# EAGLE board ahe_v1_1 (EAGLE 9.6.2)
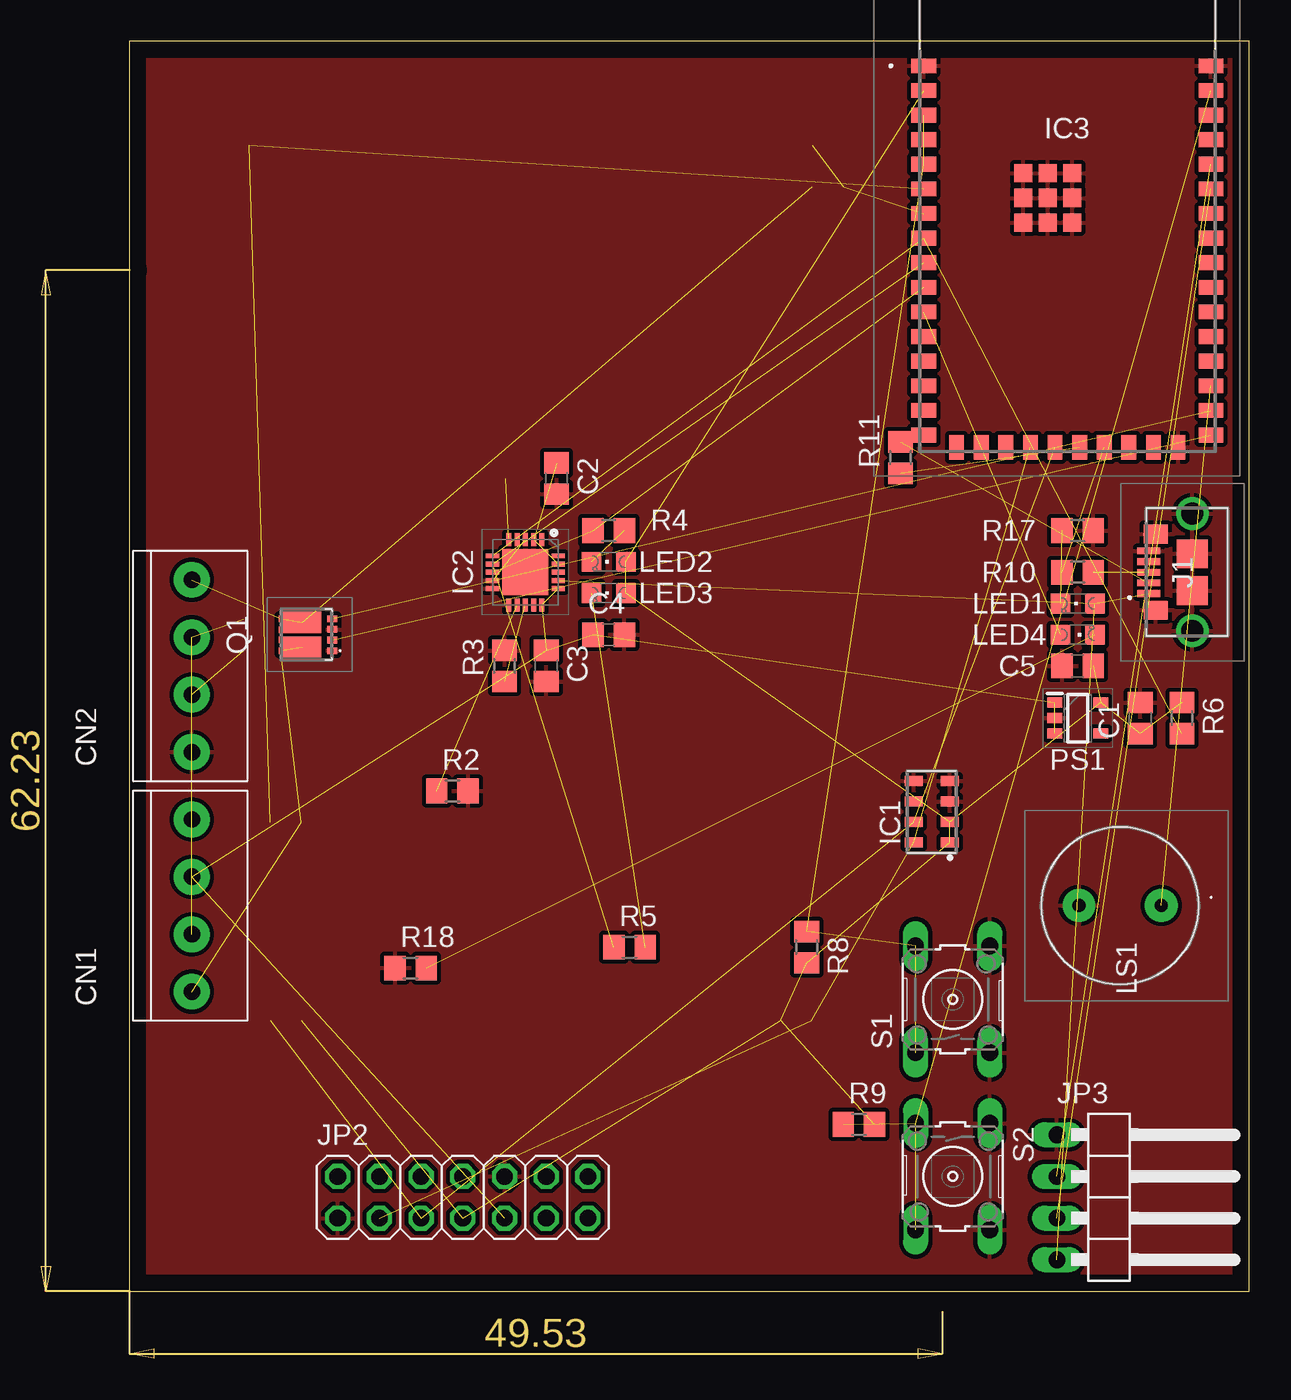
[diagram p0: board, top side]
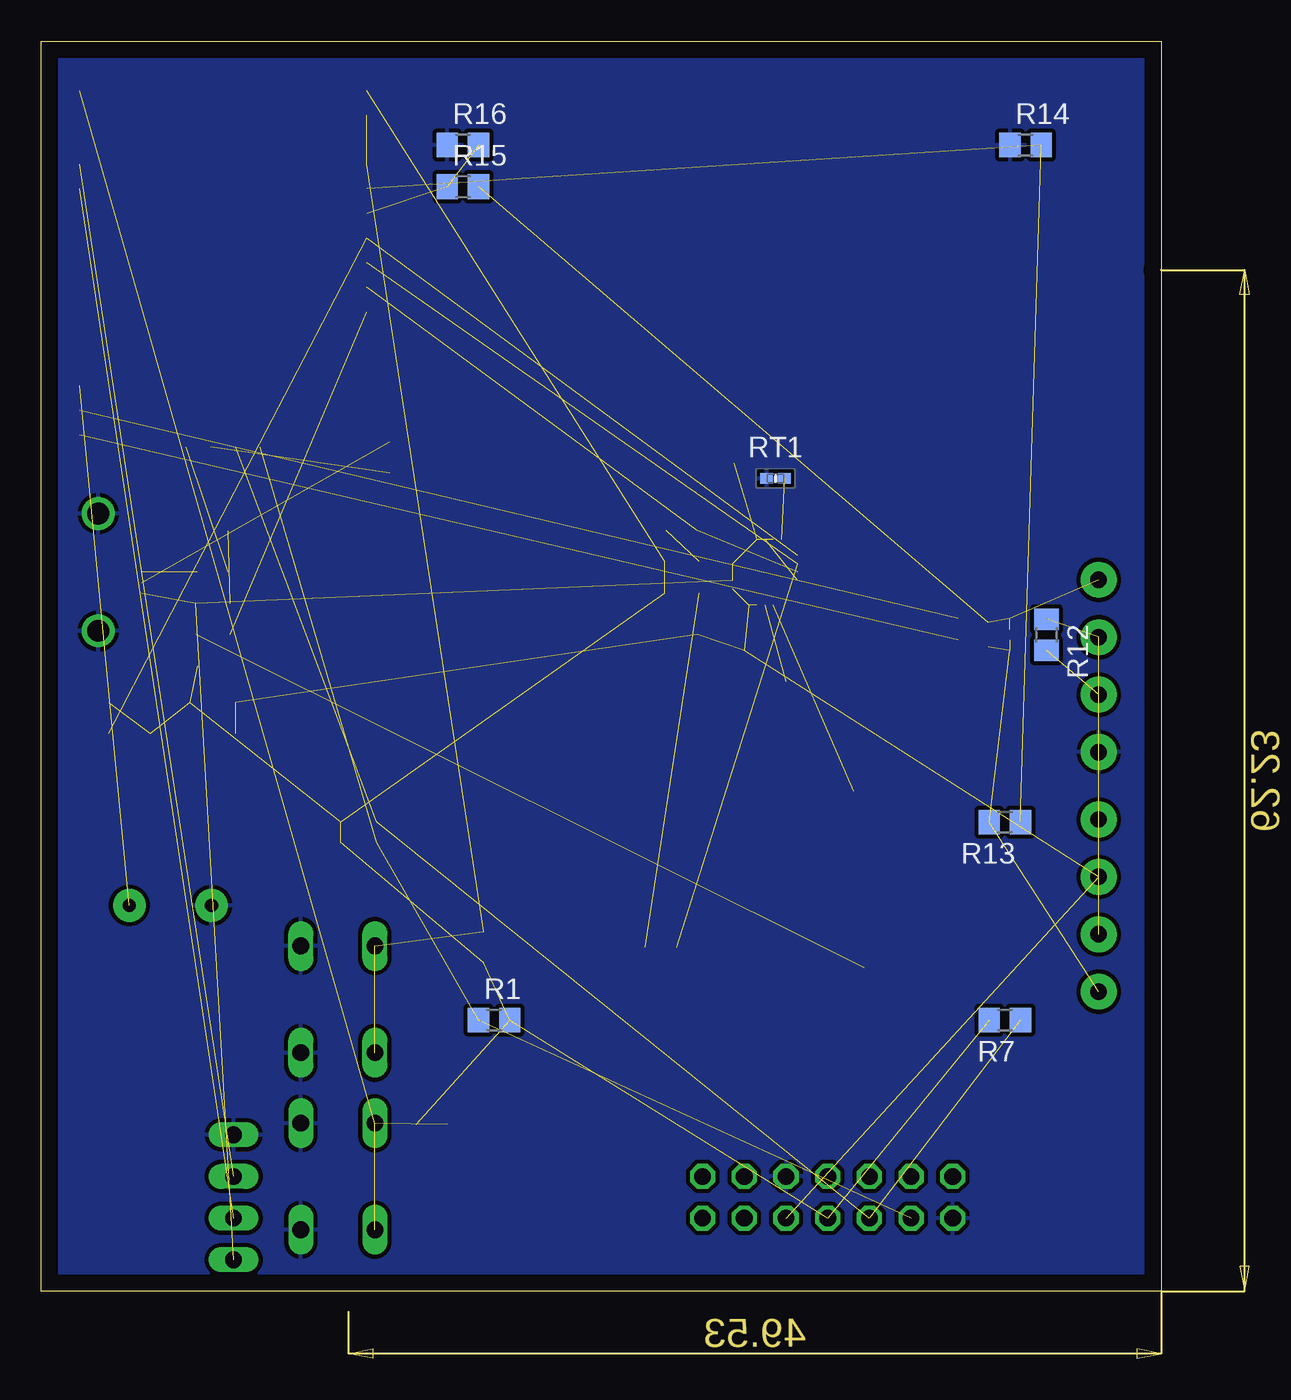
[diagram p1: board, bottom side, seen from below]

Size 68.25 x 76.19 mm. Coordinates in mm from the lower left corner, seen from the top.
Outline: 0,0 68.25,0 68.25,76.19 0,76.19 0,0
Copper layers (1*16): Top 0.035mm / dielectric 1.5mm / Bottom 0.035mm
Design rules "default": minimum track width 6mil, minimum drill 0.35mm, track to track 6mil, track to pad 6mil, pad to pad 6mil, via to via 6mil, smd to smd 6mil, copper to edge 40mil, drill to drill 6mil, minimum pad ring 10mil, minimum via ring 8mil, stop-mask expansion 4mil, vias tented up to drill 0mil, thermal gap 10mil
Net classes: 0 default: width 0.381 mm, clearance 0.254 mm; 1 PWR: width 0.762 mm, clearance 0.305 mm
tKeepout: area 5.7,13.3 to 45.1,71.8

## Footprints (pad centres in the part's own frame; a part is rotated, then mirrored left to right if it is on the bottom)
C0805 = smd 1.3 x 1.5: 1 -0.95,0; 2 0.95,0
1X04-3.5MM = drill 1 pad 2.184: 1 -5.25,0; 2 -1.75,0; 3 1.75,0; 4 5.25,0
MS5607-02BA03 = smd 1.1 x 0.6: 1 -1.1,1.875; 2 -1.1,0.625; 3 -1.1,-0.625; 4 -1.1,-1.875; 5 1.1,-1.875; 6 1.1,-0.625; 7 1.1,0.625; 8 1.1,1.875
QFN50P400X400X100-21N = smd 0.8 x 0.3: 1 -2,1; 2 -2,0.5; 3 -2,0; 4 -2,-0.5; 5 -2,-1; 11 2,-1; 12 2,-0.5; 13 2,0; 14 2,0.5; 15 2,1 | smd 0.3 x 0.8: 6 -1,-2; 7 -0.5,-2; 8 0,-2; 9 0.5,-2; 10 1,-2; 16 1,2; 17 0.5,2; 18 0,2; 19 -0.5,2; 20 -1,2 | smd 2.8 x 2.8: 21 0,0
ESP32S2WROOMIM22S2H3200UH3Q0 = smd 1.5 x 0.9: 1 -8.75,8; 2 -8.75,6.5; 3 -8.75,5; 4 -8.75,3.5; 5 -8.75,2; 6 -8.75,0.5; 7 -8.75,-1; 8 -8.75,-2.5; 9 -8.75,-4; 10 -8.75,-5.5; 11 -8.75,-7; 12 -8.75,-8.5; 13 -8.75,-10; 14 -8.75,-11.5; 15 -8.75,-13; 16 -8.75,-14.5; 27 8.75,-14.5; 28 8.75,-13; 29 8.75,-11.5; 30 8.75,-10; 31 8.75,-8.5; 32 8.75,-7; 33 8.75,-5.5; 34 8.75,-4; 35 8.75,-2.5; 36 8.75,-1; 37 8.75,0.5; 38 8.75,2; 39 8.75,3.5; 40 8.75,5; 41 8.75,6.5; 42 8.75,8 | smd 0.9 x 1.5: 17 -6.75,-15.25; 18 -5.25,-15.25; 19 -3.75,-15.25; 20 -2.25,-15.25; 21 -0.75,-15.25; 22 0.75,-15.25; 23 2.25,-15.25; 24 3.75,-15.25; 25 5.25,-15.25; 26 6.75,-15.25 | smd 1.1 x 1.1: 43 -1.19,-0.05; 44 -1.19,-1.55; 45 0.31,-1.55; 46 0.31,-0.05; 47 0.31,1.45; 48 -1.19,1.45; 49 -2.69,1.45; 50 -2.69,-0.05; 51 -2.69,-1.55
USB307530A = smd 0.4 x 1.4: 1 -1.3,2.65; 2 -0.65,2.65; 3 0,2.65; 4 0.65,2.65; 5 1.3,2.65 | drill 1.329 pad 1.85: MH1 -3.575,0; MH2 3.575,0 | smd 1.75 x 1.9: MP1 -1.125,0; MP2 1.125,0 | smd 1.15 x 1.45: MP3 -2.32,2.23; MP4 2.32,2.23
2X07 = drill 1.016 octagon: 1 -7.62,-1.27; 2 -7.62,1.27; 3 -5.08,-1.27; 4 -5.08,1.27; 5 -2.54,-1.27; 6 -2.54,1.27; 7 0,-1.27; 8 0,1.27; 9 2.54,-1.27; 10 2.54,1.27; 11 5.08,-1.27; 12 5.08,1.27; 13 7.62,-1.27; 14 7.62,1.27
1X04/90 = drill 1.016 long: 1 -3.81,-3.81; 2 -1.27,-3.81; 3 1.27,-3.81; 4 3.81,-3.81
CHIPLED_0805 = smd 1.2 x 1.2: A 0,-1.05; C 0,1.05
CMI96050580T = drill 0.8 pad 2: 1 0,0; 2 0,-5
SOT95P280X125-5N = smd 0.9 x 0.6: 1 -1.4,0.95; 2 -1.4,0; 3 -1.4,-0.95; 4 1.4,-0.95; 5 1.4,0.95
TSM200N03DPQ33RGG = smd 0.4 x 0.6: 1 -0.975,-1.563; 2 -0.325,-1.563; 3 0.325,-1.563; 4 0.975,-1.563 | smd 0.4 x 0.25: 5 0.975,1.563; 6 0.31,1.563; 7 -0.31,1.563; 8 -0.975,1.563 | smd 1.29 x 2.35: 9 0.755,0.262; 10 -0.755,0.262
R0805 = smd 1.3 x 1.5: 1 -0.95,0; 2 0.95,0
THRMC1005X60N = smd 0.75 x 0.65: 1 -0.55,0; 2 0.55,0
B3F-10XX = drill 1.016 long: 1 -3.251,2.261; 2 3.251,2.261; 3 -3.251,-2.261; 4 3.251,-2.261

## Placement (x,y rotation side)
C1  100n  [C0805]  61.59,34.92 90 top
C2  10u  [C0805]  26.04,49.53 270 top
C3  4.7u  [C0805]  25.4,38.1 270 top
C4  1u  [C0805]  29.21,40.01 0 top
C5  1u  [C0805]  57.78,38.1 180 top
CN1  1X4-3.5MM  [1X04-3.5MM]  3.81,23.5 270 top
CN2  1X4-3.5MM  [1X04-3.5MM]  3.81,38.1 270 top
IC1  MS560702BA03-50  [MS5607-02BA03]  48.9,29.21 180 top
IC2  MCP73871-1CCI_ML  [QFN50P400X400X100-21N]  24.13,43.81 270 top
IC3  ESP32-S2-WROOM-I_M22S2H3200UH3  [ESP32S2WROOMIM22S2H3200UH3Q0]  57.15,66.67 0 top
J1  USB3075-30-A  [USB307530A]  64.77,43.81 90 top
JP2  [2X07]  20.32,5.71 0 top
JP3  [1X04/90]  60.33,5.71 270 top
LED1  [CHIPLED_0805]  57.78,41.91 90 top
LED2  [CHIPLED_0805]  29.21,44.45 90 top
LED3  [CHIPLED_0805]  29.21,42.55 90 top
LED4  [CHIPLED_0805]  57.78,40.01 270 top
LS1  CMI-9605-0580T  [CMI96050580T]  62.87,23.5 270 top
PS1  BU33SD5WG-TR  [SOT95P280X125-5N]  57.78,34.92 0 top
Q1  TSM200N03DPQ33_RGG  [TSM200N03DPQ33RGG]  10.79,40.01 90 top
R1  10k  [R0805]  40.64,16.51 0 bottom
R2  40k  [R0805]  19.68,30.48 0 top
R3  2k  [R0805]  22.86,38.1 90 top
R4  330  [R0805]  29.21,46.35 0 top
R5  330  [R0805]  30.48,20.95 0 top
R6  10k  [R0805]  64.14,34.92 90 top
R7  10k  [R0805]  9.53,16.51 180 bottom
R8  10k  [R0805]  41.27,20.95 270 top
R9  10k  [R0805]  44.45,10.16 0 top
R10  33  [R0805]  57.78,43.81 0 top
R11  33  [R0805]  46.99,50.8 90 top
R12  0  [R0805]  6.99,40.01 270 bottom
R13  100k  [R0805]  9.53,28.57 180 bottom
R14  27k  [R0805]  8.26,69.85 0 bottom
R15  100k  [R0805]  42.55,67.31 0 bottom
R16  27k  [R0805]  42.55,69.85 0 bottom
R17  330  [R0805]  57.78,46.35 180 top
R18  330  [R0805]  17.14,19.68 0 top
RT1  103KT1005T-1P  [THRMC1005X60N]  23.5,49.53 0 bottom
S1  [B3F-10XX]  50.16,17.78 90 top
S2  [B3F-10XX]  50.16,6.99 270 top

## Library data of the parts
C1-C5 = rcl; SPICEPREFIX: C
CN1 CN2 LED1-LED4 = adafruit
IC1 = MS560702BA03-50; DESCRIPTION: MS560702BA03-50, Barometric Pressure Sensor, 1200mbar 0 3.6 V Output, 8-Pin QFN; HEIGHT: mm; MANUFACTURER_NAME: TE Connectivity; MANUFACTURER_PART_NUMBER: MS560702BA03-50; MOUSER_PART_NUMBER: 824-MS560702BA03-50; MOUSER_PRICE-STOCK: https://www.mouser.co.uk/ProductDetail/Measurement-Specialties/MS560702BA03-50?qs=urSpXqmdEVImCZG1H%252BT8ng%3D%3D
IC2 = MCP73871-1CCI_ML; DESCRIPTION: Battery Management USB/AC Battery Charger w/Pwr Mgmt; HEIGHT: 1mm; MANUFACTURER_NAME: Microchip; MANUFACTURER_PART_NUMBER: MCP73871-1CCI/ML; MOUSER_PART_NUMBER: 579-MCP73871-1CCI/ML; MOUSER_PRICE-STOCK: https://www.mouser.co.uk/ProductDetail/Microchip-Technology-Atmel/MCP73871-1CCI-ML?qs=wd5RIQLrsJhV5aSUuJa0zQ%3D%3D
IC3 = ESP32-S2-WROOM-I_M22S2H3200UH3; DESCRIPTION: WiFi Modules (802.11) Module ESP32-S2 WROOM IPEX ANT; HEIGHT: 3.45mm; MANUFACTURER_NAME: Espressif Systems; MANUFACTURER_PART_NUMBER: ESP32-S2-WROOM-I(M22S2H3200UH3Q0); MOUSER_PART_NUMBER: 356-ESP32S2WRMI320UH; MOUSER_PRICE-STOCK: https://www.mouser.co.uk/ProductDetail/Espressif-Systems/ESP32-S2-WROOM-IM22S2H3200UH3Q0?qs=vHuUswq2%252BswK%2FNdFP9puyg%3D%3D
J1 = USB3075-30-A; DESCRIPTION: GCT (GLOBAL CONNECTOR TECHNOLOGY) - USB3075-30-A - USB Connector, Micro USB Type B, USB 2.0, Receptacle, 5 Ways, Surface Mount, Right Angle; HEIGHT: 2.7mm; MANUFACTURER_NAME: GCT (GLOBAL CONNECTOR TECHNOLOGY); MANUFACTURER_PART_NUMBER: USB3075-30-A; MOUSER_PART_NUMBER: 640-USB3075-30-A; MOUSER_PRICE-STOCK: https://www.mouser.co.uk/ProductDetail/GCT/USB3075-30-A?qs=KUoIvG%2F9IlbGMJplbp1ybA%3D%3D
JP2 JP3 = pinhead
LS1 = CMI-9605-0580T; DESCRIPTION: Piezo Buzzers & Audio Indicators buzzer, 9.6 mm x 5 mm deep, M, 5 VDC, 80 dB, Through Hole, Audio Indicator; HEIGHT: 5mm; MANUFACTURER_NAME: CUI Inc.; MANUFACTURER_PART_NUMBER: CMI-9605-0580T; MOUSER_PART_NUMBER: 490-CMI-9605-0580T; MOUSER_PRICE-STOCK: https://www.mouser.co.uk/ProductDetail/CUI-Devices/CMI-9605-0580T?qs=P1JMDcb91o49u9Yh70m6sw%3D%3D
PS1 = BU33SD5WG-TR; DESCRIPTION: LDO regulator,3.3V,0.5A,standby,SSOP5 ROHM BU33SD5WG-TR, LDO Voltage Regulator, 0.5A, 3.3 V +/-2%, 1.7 6 Vin, 5-Pin SSOP; HEIGHT: 1.25mm; MANUFACTURER_NAME: ROHM Semiconductor; MANUFACTURER_PART_NUMBER: BU33SD5WG-TR; MOUSER_PART_NUMBER: 755-BU33SD5WG-TR; MOUSER_PRICE-STOCK: https://www.mouser.co.uk/ProductDetail/ROHM-Semiconductor/BU33SD5WG-TR?qs=%2FKR40Cd6GUrQDzRkUEt69Q%3D%3D
Q1 = TSM200N03DPQ33_RGG; DESCRIPTION: MOSFET MOSFET, Dual, N-Ch Trench, 30V, 20A; HEIGHT: 0.8mm; MANUFACTURER_NAME: Taiwan Semiconductor; MANUFACTURER_PART_NUMBER: TSM200N03DPQ33 RGG; MOUSER_PART_NUMBER: 821-TSM200N03DPQ33RG; MOUSER_PRICE-STOCK: https://www.mouser.co.uk/ProductDetail/Taiwan-Semiconductor/TSM200N03DPQ33-RGG?qs=BZBei1rCqCAHGBwVoEKNiA%3D%3D
R1-R18 = rcl; SPICEPREFIX: R
RT1 = 103KT1005T-1P; DESCRIPTION: NTC Thermistors 103kohm 1% 0402; HEIGHT: 0.6mm; MANUFACTURER_NAME: Semitec; MANUFACTURER_PART_NUMBER: 103KT1005T-1P; MOUSER_PART_NUMBER: 954-103KT1005T-1P; MOUSER_PRICE-STOCK: https://www.mouser.co.uk/ProductDetail/Semitec/103KT1005T-1P?qs=wgO0AD0o1vtbPaSgVd2b3g%3D%3D
S1 S2 = switch-omron; MPN: B3F-1000; OC_FARNELL: 176432; OC_NEWARK: 36M3542

## Nets
BAT+ [PWR]: CN1.1 CN2.3 R12.2
BMS_C: IC2.7 IC3.9 R5.1
BMS_G: IC2.6 IC3.8 R6.1
BMS_L: IC2.8 IC3.10 R4.1
EMATCH_1: IC3.27 Q1.2
EMATCH_1- [PWR]: CN1.4 Q1.7 Q1.8 Q1.10 R13.2
EMATCH_2: IC3.28 Q1.4
EMATCH_2- [PWR]: CN2.1 Q1.5 Q1.6 Q1.9 R15.2
EMATCH_N+ [PWR]: CN1.3 CN2.2 R12.1
GND: C1.2 C2.2 C3.2 C4.2 C5.2 CN2.4 IC1.3 IC1.4 IC1.5 IC2.3 IC2.9 IC2.10 IC2.11 IC3.1 IC3.26 IC3.42 IC3.43 IC3.44 IC3.45 IC3.46 IC3.47 IC3.48 IC3.49 IC3.50 IC3.51 J1.5 J1.MH1 J1.MH2 J1.MP1 J1.MP2 J1.MP3 J1.MP4 JP2.1 JP2.10 JP3.1 LS1.2 PS1.2 Q1.1 Q1.3 R2.2 R3.2 R14.1 R16.1 R17.1 R18.1 RT1.1 S1.3 S1.4 S2.1 S2.2
I2C_SCL: IC1.8 IC3.20 JP2.3 R1.1
I2C_SDA: IC1.7 IC3.21 JP2.5 R7.1
IO_1: JP2.11
IO_2: JP2.13
IO_3: JP2.12
IO_4: JP2.14
N$1: IC2.13 R3.1
N$2: IC2.12 R2.1
N$3: IC2.5 RT1.2
N$5: IC2.1
N$9: IC3.41 R9.1 S2.3 S2.4
N$10: IC3.3 IC3.5 R8.1 S1.1 S1.2
N$14: IC3.22 R11.1
N$15: IC3.23 R10.1
N$18: LED1.C R17.2
N$20: LED2.C R4.2
N$21: LED3.C R5.2
N$22: LED4.C R18.2
N$23: IC3.11 LED4.A
SENSE_1: IC3.6 R13.1 R14.2
SENSE_2: IC3.7 R15.1 R16.2
SERIAL_ESP_RX: IC3.38 JP3.2
SERIAL_ESP_TX: IC3.37 JP3.3
SOUND: IC3.29 LS1.1
SPI_CS: JP2.2
SPI_MISO: JP2.6
SPI_MOSI: JP2.4
SPI_SCLK: JP2.8
USB_D+: J1.3 R10.2
USB_D-: J1.2 R11.2
V_3.3 [PWR]: C1.1 C5.1 IC1.1 IC1.2 IC3.2 JP2.7 LED2.A LED3.A PS1.5 R1.2 R6.2 R7.2 R8.2 R9.2
V_BAT [PWR]: C3.1 C4.1 CN1.2 IC2.14 IC2.15 IC2.16 JP2.9 PS1.1 PS1.3
VCC [PWR]: C2.1 IC2.2 IC2.4 IC2.17 IC2.18 IC2.19 J1.1 JP3.4 LED1.A

## Tracks (layer width: path | path; a pad name or v marks a point on that pad's centre or on a via)
BAT+  (2 unrouted)
BMS_C  (2 unrouted)
BMS_G  (2 unrouted)
BMS_L  (2 unrouted)
EMATCH_1  (1 unrouted)
EMATCH_1-  (4 unrouted)
EMATCH_2  (1 unrouted)
EMATCH_2-  (4 unrouted)
EMATCH_N+  (2 unrouted)
GND  (1 unrouted)
  pour Top: -1.27,78.74 69.85,78.74 69.85,-3.81 -1.27,-3.81
  pour Bottom: -1.27,78.74 70.48,78.74 70.48,-2.54 -1.27,-2.54
I2C_SCL  (3 unrouted)
I2C_SDA  (3 unrouted)
N$1  (1 unrouted)
N$2  (1 unrouted)
N$3  (1 unrouted)
N$9  (3 unrouted)
N$10  (4 unrouted)
N$14  (1 unrouted)
N$15  (1 unrouted)
N$18  (1 unrouted)
N$20  (1 unrouted)
N$21  (1 unrouted)
N$22  (1 unrouted)
N$23  (1 unrouted)
SENSE_1  (2 unrouted)
SENSE_2  (2 unrouted)
SERIAL_ESP_RX  (1 unrouted)
SERIAL_ESP_TX  (1 unrouted)
SOUND  (1 unrouted)
USB_D+  (1 unrouted)
USB_D-  (1 unrouted)
V_3.3  (13 unrouted)
V_BAT  (8 unrouted)
VCC  (8 unrouted)